# EAGLE board DoorControl (EAGLE 9.4.0)

No outline drawn. Coordinates in mm, seen from the top.
Copper layers (1*16): Top 0.035mm / dielectric 1.5mm / Bottom 0.035mm
Design rules "default": minimum track width 6mil, minimum drill 0.35mm, track to track 6mil, track to pad 6mil, pad to pad 6mil, via to via 6mil, smd to smd 6mil, copper to edge 40mil, drill to drill 6mil, minimum pad ring 10mil, minimum via ring 8mil, stop-mask expansion 4mil, vias tented up to drill 0mil, thermal gap 10mil

## Footprints (pad centres in the part's own frame; a part is rotated, then mirrored left to right if it is on the bottom)
RESC3216X65 = smd 1.4 x 1.95: 1 -1.4,0; 2 1.4,0

## Placement (x,y rotation side)
E$1  [RESC3216X65]  13.97,40.64 0 top

## Library data of the parts
E$1 = CRCW12060000Z0EA